# Altium PCB PCB1.PcbDoc
Units mm, origin at the board's own origin, x right, y up, seen from the top; angles counter-clockwise.
Board outline 24 x 17 mm, 2 copper layers (Top Layer, Bottom Layer); 9 components, 5 nets, 20 pads, 0 vias.
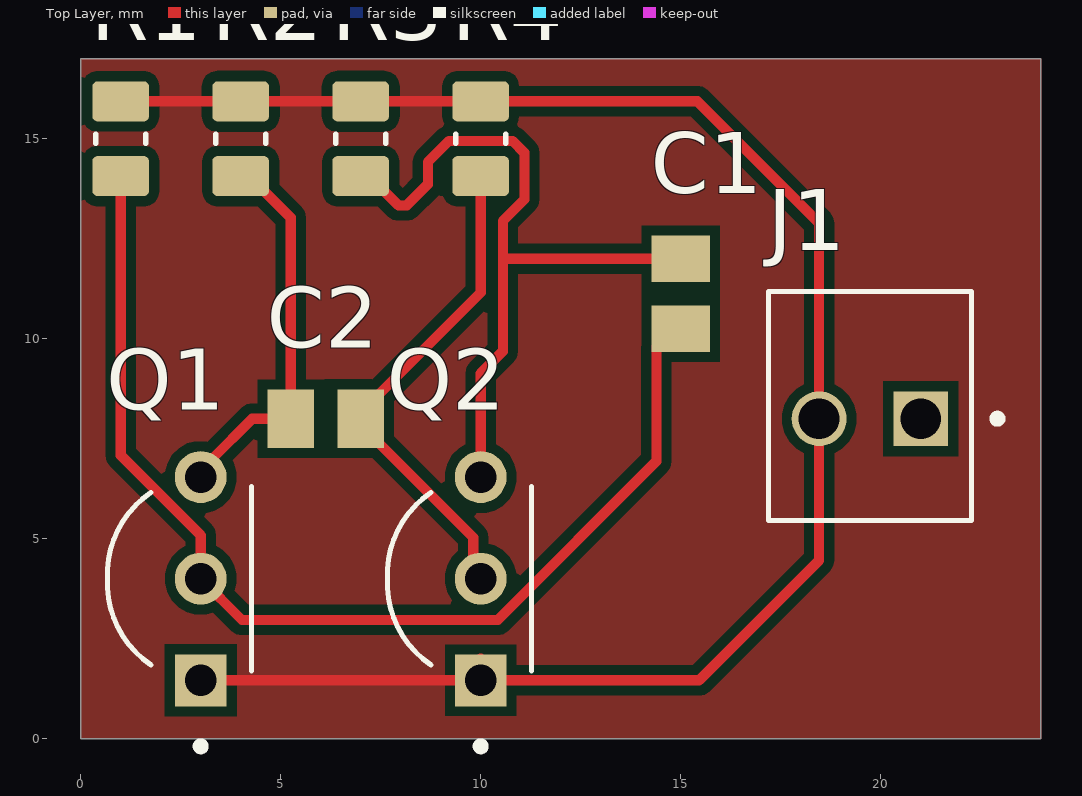
[diagram p0: Top Layer view]
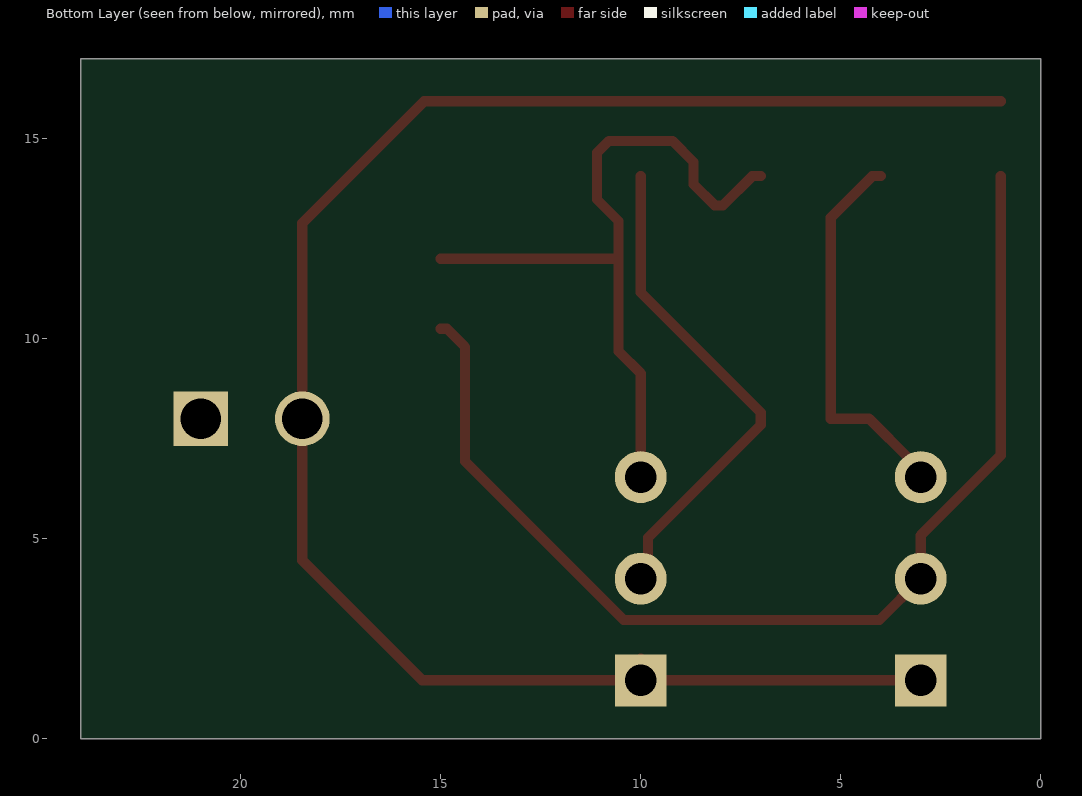
[diagram p1: Bottom Layer view, seen from below]
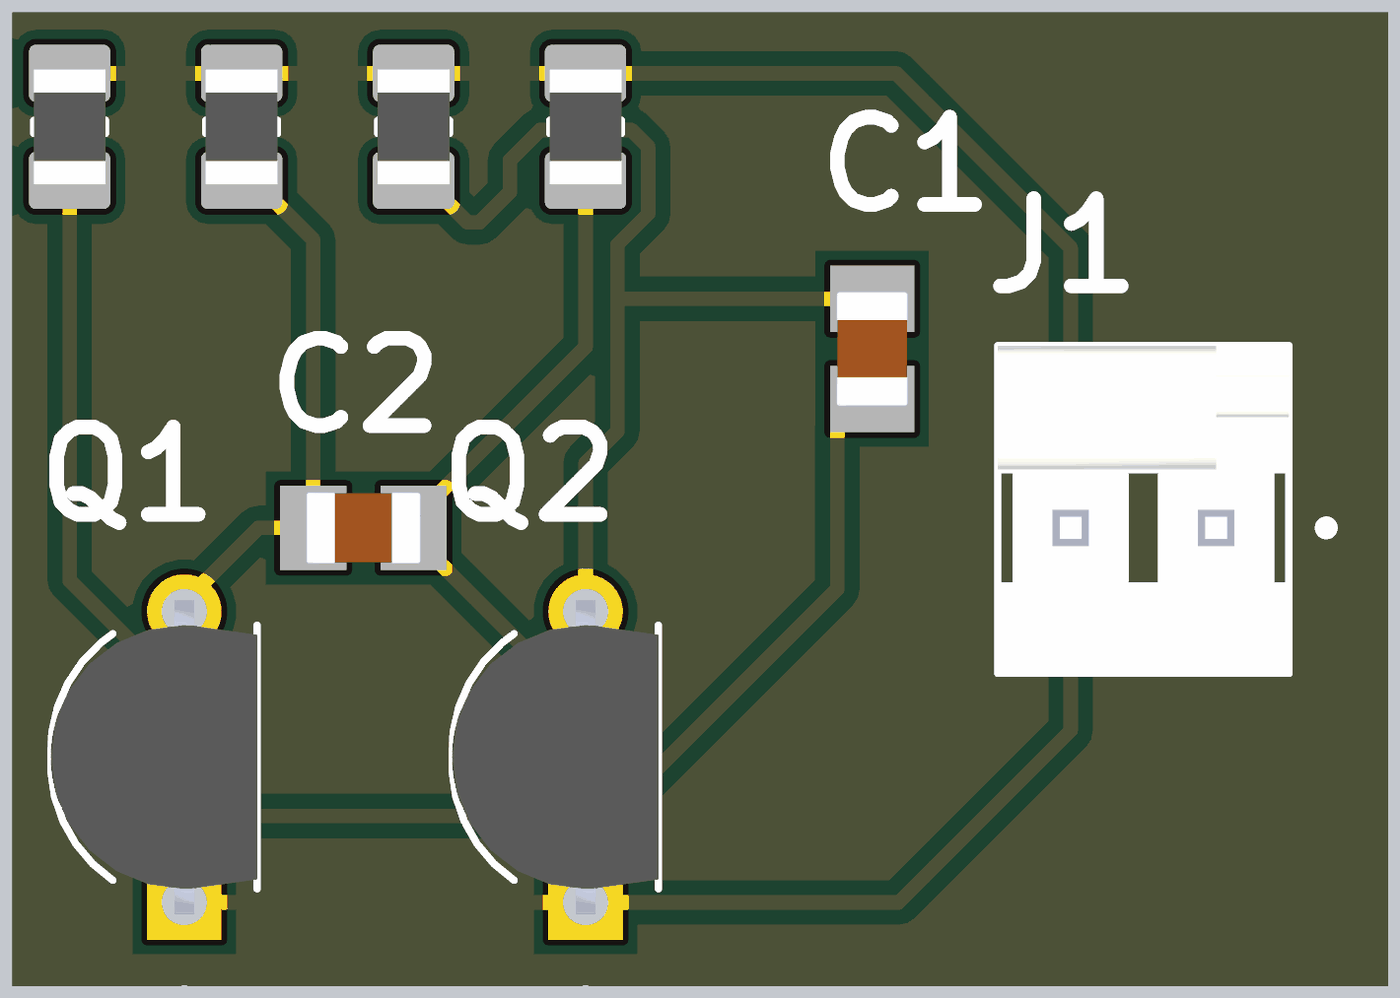
[diagram p2: 3D render of the assembled board from above, using the file's embedded part models]

## Layer stack, top to bottom
Top Solder: solder mask 0.0102, Solder Resist, Dk 3.5
Top Layer: signal copper 0.0356
Dielectric 1: dielectric 0.32, FR-4, Dk 4.8
Bottom Layer: signal copper 0.0356
Bottom Solder: solder mask 0.0102, Solder Resist, Dk 3.5

## Board outline
0,0 24,0 24,17 0,17

## Design rules (kind name [scope] priority, off if disabled: settings)
Clearance [All] p1: gap=0.254 ignorepadtopadclearanceinfootprint=FALSE except(0.3: Arc-Arc Arc-Track Track-Track)
PolygonConnect [All] p1: connectstyle=Relief reliefconductorwidth=0.254 reliefentries=4 polygonreliefangle="90 Angle" airgapwidth=0.254
RoutingVias [All] p1: holewidth=0.6 width=1 viastyle="Through Hole" minholewidth=0.4 minwidth=0.7 maxholewidth=0.711 maxwidth=1.27
SolderMaskExpansion [All] p1: expansion=0.102 istentingtop=FALSE
SupplyNets "Schematic Supply Nets_1" [InNet('+12V')] p1: voltage=0.000
Width [All] p1: maxlimit=1 minlimit=0.1 preferedwidth=0.254
30 further rules are at their usual default settings.

## Components (designator, comment, footprint, x,y, rotation, side; value= is the part's Value field where it differs from the comment)
C1 "C0805C223K4RACTU" CAPC2012X88N 15,11.125 r270 top
C2 "C0805C223K4RACTU" CAPC2012X88N 6.125,8 r180 top
J1 "640456-2" TE_640456-2 21,8 r0 top
Q1 "2N3904" TO92254P460H750-3 3,4 r90 top
Q2 "2N3904" TO92254P460H750-3 10,4 r90 top
R1 "CRG0805F33R" RESC2012X65N 1,15 r90 top
R2 "CRG0805F33R" RESC2012X65N 4,15 r90 top
R3 "CRG0805F33R" RESC2012X65N 7,15 r90 top
R4 "CRG0805F33R" RESC2012X65N 10,15 r90 top

## Footprints (in the part's own frame and the unit in brackets; to place one, negate y for a bottom-side part, rotate by r counter-clockwise, add the part's x,y. Pads: shape width x height; smd on the part's side, far side on the other; paste and mask are expansions set on the pad)
CAPC2012X88N [mm]
  rect 1.16x1.47 smd: 1(-0.875,0) 2(0.875,0)
  body extent -1,-0.63 1,0.63, height 0.88
RESC2012X65N [mm]
  rrect25% 1x1.42 smd: 1(-0.935,0) 2(0.935,0)
  silkscreen extent -0.12,-0.63 0.12,0.63, body extent -1,-0.63 1,0.63, height 0.65
TE_640456-2 [mm]
  round 1.37 hole 1.02: 2(-2.54,0)
  rect 1.37x1.37 / inner round 1.37 / far side rect 1.37x1.37 hole 1.02: GND(0,0)
  silkscreen extent -3.81,-2.54 2.02,3.18, body extent -3.81,-2.54 1.27,3.17, height 10.03
TO92254P460H750-3 [mm]
  round 1.298 hole 0.79: 2(0,0) 3(2.54,0)
  rect 1.298x1.298 / inner round 1.298 / far side rect 1.298x1.298 hole 0.79: GND(-2.54,0)
  silkscreen extent -4.29,-1.27 2.3,2.33, body extent -2.74,-1.27 2.74,2.33, height 8.09

## Part data
C1 C2: "Capacitor, Ceramic, 22nF, 16VDC, 10-% Tol, 10+% Tol, X7R-TC Code, -15, 15%-TC", Package="805-2 KEMET", Check_prices=https://www.snapeda.com/parts/C0805C223K4RACTU/KEMET/view-part/?ref=eda, MF=KEMET, MP=C0805C223K4RACTU, SnapEDA_Link=https://www.snapeda.com/parts/C0805C223K4RACTU/KEMET/view-part/?ref=snap
J1: "Header Friction Lock MTA-100 2 250 VAC Polyester Tin Copper Alloy Tin", Package=None, Check_prices=https://www.snapeda.com/parts/640456-2/TE+Connectivity+AMP+Connectors/view-part/?ref=eda, MF="TE Connectivity", MP=640456-2, SnapEDA_Link=https://www.snapeda.com/parts/640456-2/TE+Connectivity+AMP+Connectors/view-part/?ref=snap
Q1 Q2: "BJT, TO-92, 40V, 200mA, NPN, 0.625W, 150Â°C", Package="TO-92 Diotec", Check_prices=https://www.snapeda.com/parts/2N3904/Diotec/view-part/?ref=eda, MF="Diotec Semiconductor", MP=2N3904, SnapEDA_Link=https://www.snapeda.com/parts/2N3904/Diotec/view-part/?ref=snap
R1 R2 R3 R4: "Fixed Resistors", Package=0805, Availability="In Stock", Check_prices=https://www.snapeda.com/parts/CRG0805F33R/TE+Connectivity+Passive+Product/view-part/?ref=eda, EU_RoHS_Compliance="Compliant with Exemptions", MF="TE Connectivity", MP=CRG0805F33R, Price=None, Purchase-URL=https://pricing.snapeda.com/search/part/CRG0805F33R/?ref=eda, SnapEDA_Link=https://www.snapeda.com/parts/CRG0805F33R/TE+Connectivity+Passive+Product/view-part/?ref=snap

## Nets (pads, with @x,y where several pads share a name; then routed paths per layer and width w, separated by ;. In a path a pad name is that pad's centre, name@x,y a point inside that pad or via, vN(x,y) a via of type N, cw(c..) or ccw(c..) an arc to the next point about the centre after c; other vN are vias at no path point)
+12V: J1.2 R1.2 R2.2 R3.2 R4.2 | length 38.2
  Top Layer w0.254: R1.2 R2.2 R3.2 R4.2 15.415,15.935 18.46,12.89 J1.2 18.46,4.46 15.46,1.46 10,1.46 10,2 9.46,1.46
NetC1_1: C1.1 Q2.3 R3.1 | length 18.5
  Top Layer w0.254: R3.1 7.21,14.065 7.942,13.333 8.153,13.333 8.679,13.859 8.679,14.42 9.205,14.946 10.795,14.946 11.091,14.65 11.091,13.48 10.554,12.943 10.554,12 ; Q2.3 10,9.134 10.554,9.688 10.554,12 ; C1.1 10.554,12
NetC1_2: C1.2 Q1.2 R1.1 | length 28
  Top Layer w0.254: R1.1 1,7.083 3,5.083 Q1.2 4.03,2.97 10.427,2.97 14.392,6.935 14.392,9.797 14.845,10.25 C1.2
NetC2_1: C2.1 Q2.2 R4.1 | length 12.6
  Top Layer w0.254: Q2.2 9.815,4.185 9.815,5.03 7,7.845 C2.1 7,8.155 10,11.155 R4.1
NetC2_2: C2.2 Q1.3 R2.1 | length 9.9
  Top Layer w0.254: Q1.3 3,7 3.033,6.967 3.256,6.967 4.289,8 C2.2 5.25,13.025 4.21,14.065 R2.1
pads on no net: J1.GND Q1.GND Q2.GND
copper on no net: | length 6.5
  Top Layer w0.254: 3,1.46 9.46,1.46

## Polygon pours and split planes (outlines as drawn)
NetC1_1 on Top Layer "NETC1_1_L01_P002" (solid, pour order 2): 0,17 24,17 24,0 0,0
no net on Top Layer "NONET_L01_P000" (solid, pour order 0): 0,17 24,17 24,0 0,0

## Silkscreen, mask and mechanical layers (free items; w line width, h text height)
Mechanical 1:
  the board outline again, w0.254